# EAGLE board arduino_l293d (EAGLE 5.12)
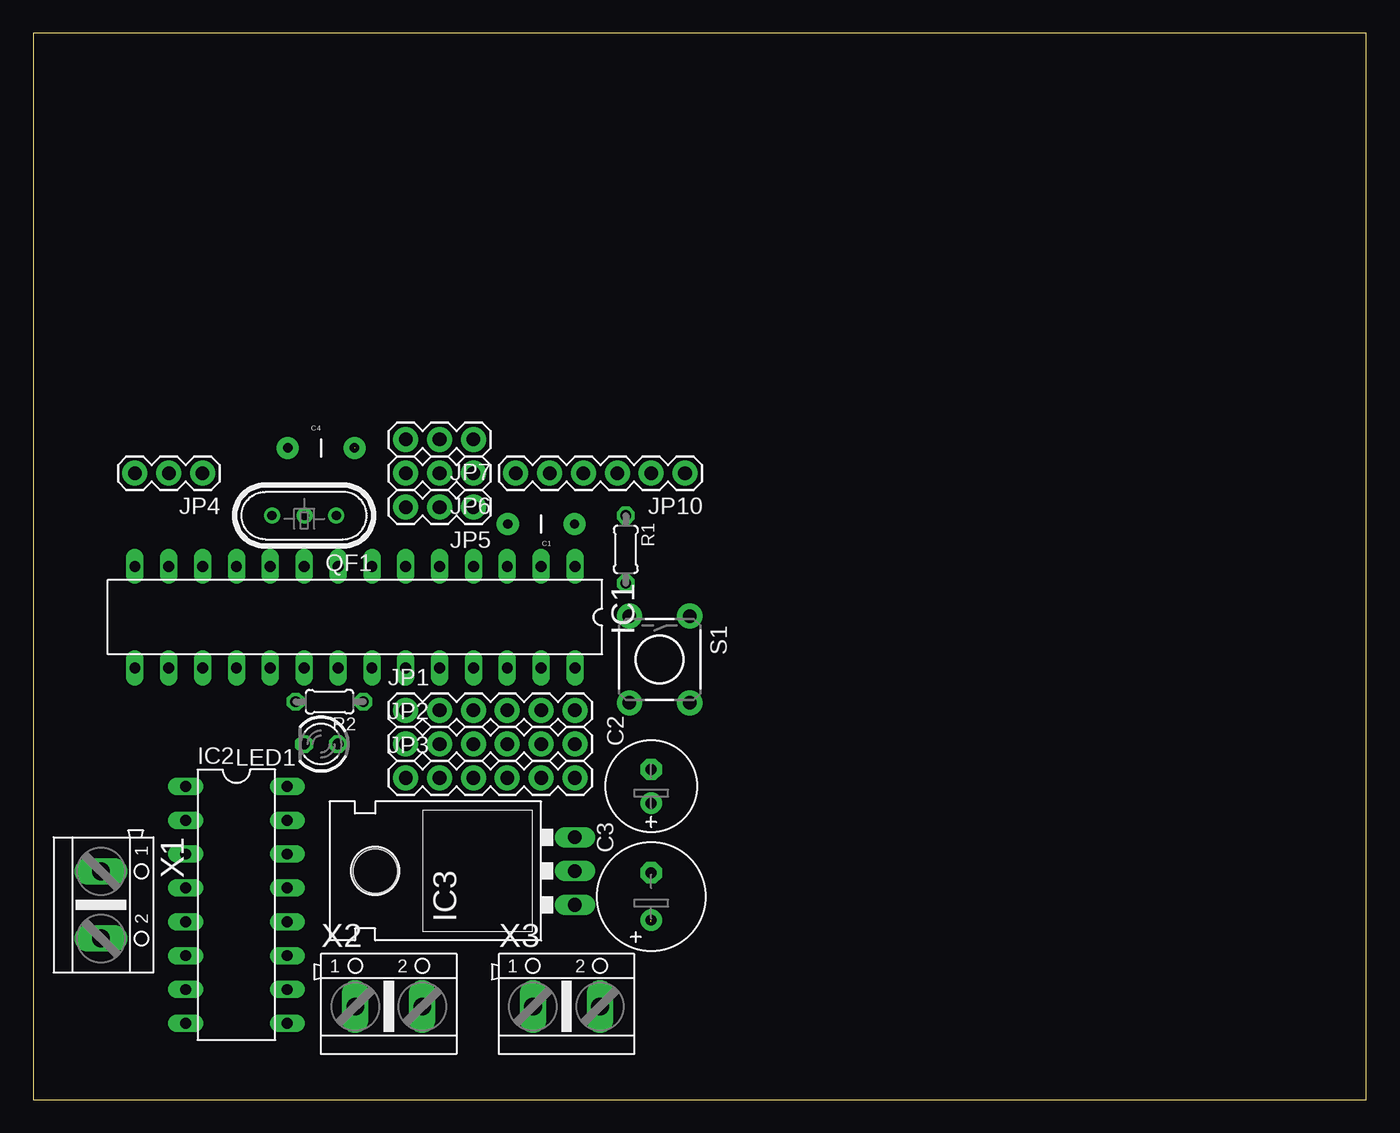
[diagram p0: board, top side]
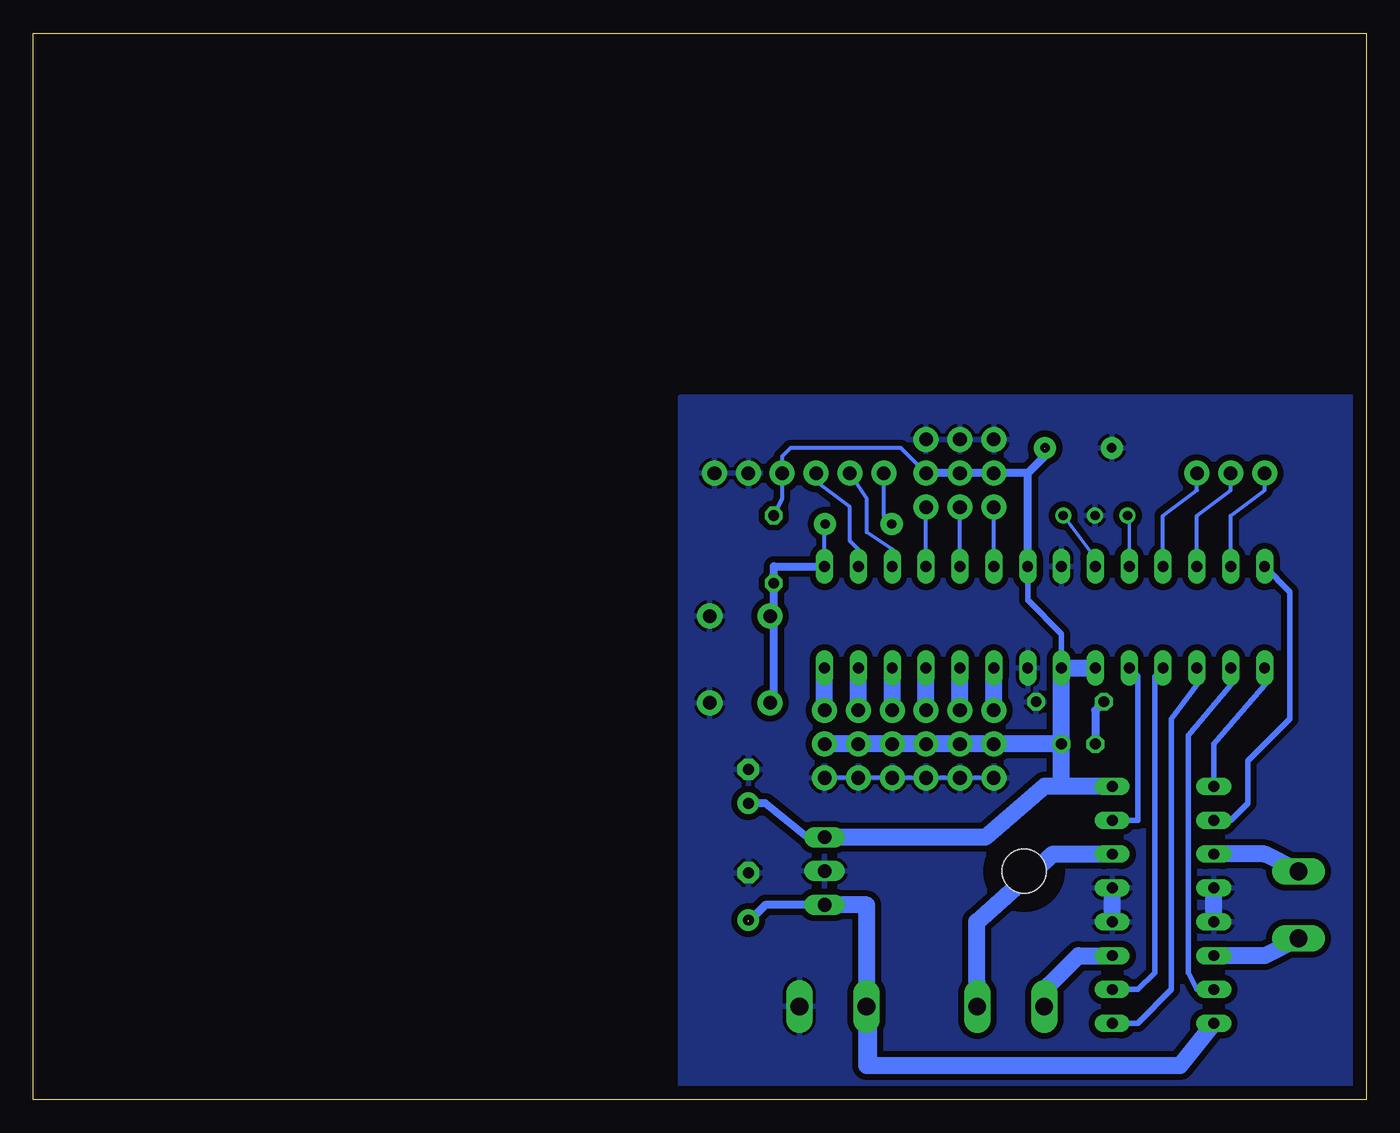
[diagram p1: board, bottom side, seen from below]

Size 100 x 80 mm. Coordinates in mm from the lower left corner, seen from the top.
Outline: 0,0 100,0 100,80 0,80 0,0
Copper layers (1*16): Top 0.035mm / dielectric 1.5mm / Bottom 0.035mm
Design rules "default *": minimum track width 10mil, minimum drill 24mil, track to track 18mil, track to pad 18mil, pad to pad 8mil, via to via 8mil, smd to smd 8mil, copper to edge 40mil, drill to drill 8mil, minimum pad ring 10mil, minimum via ring 8mil, stop-mask expansion 4mil, vias tented up to drill 0mil, thermal gap 10mil

## Footprints (pad centres in the part's own frame; a part is rotated, then mirrored left to right if it is on the bottom)
CAP-PTH-5MM = drill 0.7 pad 1.651 round: 1 -2.5,0; 2 2.5,0
E2,5-7 = drill 0.813 pad 1.6 round: + -1.27,0 | drill 0.813 pad 1.6 octagon: - 1.27,0
E3,5-8 = drill 0.813 pad 1.6 round: + -1.778,0 | drill 0.813 pad 1.6 octagon: - 1.778,0
DIL28-3 = drill 0.813 long: 1 -16.51,-3.81; 2 -13.97,-3.81; 3 -11.43,-3.81; 4 -8.89,-3.81; 5 -6.35,-3.81; 6 -3.81,-3.81; 7 -1.27,-3.81; 8 1.27,-3.81; 9 3.81,-3.81; 10 6.35,-3.81; 11 8.89,-3.81; 12 11.43,-3.81; 13 13.97,-3.81; 14 16.51,-3.81; 15 16.51,3.81; 16 13.97,3.81; 17 11.43,3.81; 18 8.89,3.81; 19 6.35,3.81; 20 3.81,3.81; 21 1.27,3.81; 22 -1.27,3.81; 23 -3.81,3.81; 24 -6.35,3.81; 25 -8.89,3.81; 26 -11.43,3.81; 27 -13.97,3.81; 28 -16.51,3.81
DIL16 = drill 0.813 long: 1 -8.89,-3.81; 2 -6.35,-3.81; 3 -3.81,-3.81; 4 -1.27,-3.81; 5 1.27,-3.81; 6 3.81,-3.81; 7 6.35,-3.81; 8 8.89,-3.81; 9 8.89,3.81; 10 6.35,3.81; 11 3.81,3.81; 12 1.27,3.81; 13 -1.27,3.81; 14 -3.81,3.81; 15 -6.35,3.81; 16 -8.89,3.81
TO-220-ALT = drill 1.016 long: GND 0,-3.81; IN -2.54,-3.81; OUT 2.54,-3.81 | hole 3.302: 0,11.176
1X06 = drill 1.016 pad 1.88 round: 1 0,0; 2 2.54,0; 3 5.08,0; 4 7.62,0; 5 10.16,0; 6 12.7,0
1X03 = drill 1.016 pad 1.88 round: 1 0,0; 2 2.54,0; 3 5.08,0
LED3MM = drill 0.813 octagon: A -1.27,0; K 1.27,0
HC49U = drill 0.7 pad 1.2 round: 1 -2.413,0; 2 -0.027,0; 3 2.413,0
0204/5 = drill 0.813 octagon: 1 -2.54,0; 2 2.54,0
TACTILE-PTH = drill 1.016 pad 1.88 round: 1 -3.251,2.261; 2 3.251,2.261; 3 -3.251,-2.261; 4 3.251,-2.261
AK500/2 = drill 1.321 long: 1 -2.515,0; 2 2.515,0

## Placement (x,y rotation side)
C1  [CAP-PTH-5MM]  38.1,43.18 180 top
C2  [E2,5-7]  46.35,23.5 90 top
C3  [E3,5-8]  46.35,15.24 90 top
C4  [CAP-PTH-5MM]  21.59,48.9 0 top
IC1  MEGA8-P  [DIL28-3]  24.13,36.2 180 top
IC2  L293D  [DIL16]  15.24,14.61 270 top
IC3  [TO-220-ALT]  36.83,17.14 90 top
JP1  [1X06]  27.94,29.21 0 top
JP2  [1X06]  27.94,26.67 0 top
JP3  [1X06]  27.94,24.13 0 top
JP4  [1X03]  12.7,46.99 180 top
JP5  [1X03]  33.02,44.45 180 top
JP6  [1X03]  33.02,46.99 180 top
JP7  [1X03]  33.02,49.53 180 top
JP10  [1X06]  48.9,46.99 180 top
LED1  [LED3MM]  21.59,26.67 180 top
QF1  10M10BHC49T  [HC49U]  20.32,43.81 180 top
R1  [0204/5]  44.45,41.27 270 top
R2  [0204/5]  22.23,29.84 180 top
S1  [TACTILE-PTH]  46.99,33.02 270 top
X1  [AK500/2]  5.08,14.61 270 top
X2  [AK500/2]  26.67,6.99 0 top
X3  [AK500/2]  40.01,6.99 0 top

## Library data of the parts
C1 C4 IC3 JP1-JP7 JP10 S1 = SparkFun
C2 C3 = resistor
IC1 = atmel; OC_FARNELL: unknown; OC_NEWARK: unknown
IC2 = st-microelectronics; MPN: L293D; OC_FARNELL: 9589619; OC_NEWARK: 56P8249
LED1 = led
QF1 = crystal; OC_FARNELL: unknown; OC_NEWARK: unknown
R1 R2 = rcl
X1-X3 = con-ptr500; OC_FARNELL: unknown; OC_NEWARK: unknown

## Nets
+5V: C2.+ C4.2 IC1.7 IC1.20 IC1.21 IC2.16 IC3.OUT JP2.1 JP2.2 JP2.3 JP2.4 JP2.5 JP2.6 JP6.1 JP6.2 JP6.3 JP10.3 LED1.A R1.1
+24V: C3.+ IC2.8 IC3.IN X3.1
EN_12: IC1.15 IC2.1
EN_34: IC1.17 IC2.9
GND: C2.- C3.- C4.1 IC1.8 IC1.22 IC2.4 IC2.5 IC2.12 IC2.13 IC3.GND JP3.1 JP3.2 JP3.3 JP3.4 JP3.5 JP3.6 JP7.1 JP7.2 JP7.3 JP10.1 JP10.2 QF1.2 R2.1 S1.1 S1.2 X3.2
IN_1A: IC1.14 IC2.2
IN_2A: IC1.16 IC2.7
IN_3A: IC1.18 IC2.10
IN_4A: IC1.19 IC2.15
N$1: IC2.3 X1.1
N$2: IC1.10 QF1.3
N$3: IC1.9 QF1.1
N$4: IC2.6 X1.2
N$5: IC1.23 JP1.1
N$6: IC2.14 X2.2
N$7: IC2.11 X2.1
N$8: IC1.24 JP1.2
N$9: IC1.25 JP1.3
N$10: IC1.26 JP1.4
N$11: IC1.27 JP1.5
N$12: IC1.28 JP1.6
N$13: IC1.11 JP4.1
N$14: IC1.12 JP4.2
N$15: IC1.13 JP4.3
N$16: IC1.4 JP5.1
N$17: IC1.5 JP5.2
N$18: IC1.6 JP5.3
N$19: LED1.K R2.2
N$23: IC1.3 JP10.5
N$25: IC1.2 JP10.4
N$27: C1.1 IC1.1 R1.2 S1.3 S1.4
N$28: C1.2 JP10.6

## Tracks (layer width: path | path; a pad name or v marks a point on that pad's centre or on a via)
+5V  (1 unrouted)
  Bottom 0.305: JP2.6 JP2.5 JP2.4 JP2.3 JP2.2 JP2.1 LED1.A | R1.1 43.81,45.09 JP10.3 43.81,48.26 43.18,48.9 34.92,48.9 JP6.1
  Bottom 0.406: IC1.21 22.86,34.92 25.4,37.47 IC1.7
  Bottom 0.61: IC3.OUT 41.91,19.68 45.09,22.23 C2.+ | 25.4,46.99 24.13,48.26 24.13,48.9 | IC1.7 25.4,46.99 | 25.4,46.99 JP6.3 JP6.2 JP6.1
  Bottom 1.27: 22.86,23.5 LED1.A | LED1.A IC1.21 IC1.20 | IC3.OUT 28.57,19.68 24.13,23.5 22.86,23.5 | IC2.16 22.86,23.5 | LED1.A JP2.6
+24V  (1 unrouted)
  Bottom 0.254: 36.83,2.54 36.83,6.35 X3.1
  Bottom 0.61: 46.35,13.34 45.09,14.61 IC3.IN
  Bottom 1.27: IC2.8 13.97,2.54 36.83,2.54 37.47,2.54 37.47,14.61 IC3.IN
EN_12
  Bottom 0.406: IC1.15 7.62,31.11 11.43,26.67 IC2.1
EN_34
  Bottom 0.406: IC2.9 17.14,5.71 14.61,8.26 14.61,28.57 12.7,31.11 IC1.17
GND
  Bottom 0.305: JP3.1 JP3.2 JP3.3 JP3.4 JP3.5 JP3.6
  Bottom 1.27: IC2.5 IC2.4 | IC2.12 IC2.13
  pour Bottom: 0.64,52.7 0.64,0.64 51.44,0.64 51.44,52.7
IN_1A
  Bottom 0.406: IC2.2 10.16,20.95 8.89,22.23 8.89,25.4 5.71,28.57 5.71,38.1 IC1.14
IN_2A
  Bottom 0.406: IC1.16 10.16,31.11 13.34,27.3 13.34,9.53 12.7,8.26 IC2.7
IN_3A
  Bottom 0.406: IC1.18 15.88,31.75 15.88,9.53 17.14,8.26 IC2.10
IN_4A
  Bottom 0.406: IC2.15 17.14,20.95 17.14,31.75 IC1.19
N$1
  Bottom 0.254: X1.1 5.08,17.78 5.33,17.27
  Bottom 1.27: IC2.3 7.62,18.41 5.33,17.27 5.08,17.14
N$2
  Bottom 0.254: IC1.10 17.78,43.81 QF1.3
N$3
  Bottom 0.254: IC1.9 20.32,40.64 QF1.1
N$4
  Bottom 0.254: 5.08,12.7 X1.2 5.08,12.06
  Bottom 1.27: IC2.6 7.62,10.79 5.08,12.06
N$5
  Bottom 1.27: JP1.1 IC1.23
N$6
  Bottom 0.254: 29.21,8.89 29.21,7.62 X2.2
  Bottom 1.27: IC2.14 23.5,18.41 29.21,13.34 29.21,8.89 29.21,8.26
N$7
  Bottom 0.254: X2.1 24.13,7.62 24.13,8.89 23.81,8.57
  Bottom 1.27: 24.13,8.26 23.81,8.57 21.59,10.79 IC2.11
N$8
  Bottom 1.27: JP1.2 IC1.24
N$9
  Bottom 1.27: JP1.3 IC1.25
N$10
  Bottom 1.27: JP1.4 IC1.26
N$11
  Bottom 1.27: JP1.5 IC1.27
N$12
  Bottom 1.27: JP1.6 IC1.28
N$13
  Bottom 0.305: IC1.11 15.24,43.81 12.7,45.72 JP4.1
N$14
  Bottom 0.305: IC1.12 12.7,43.81 10.16,45.72 JP4.2
N$15
  Bottom 0.305: IC1.13 10.16,43.81 7.62,45.72 JP4.3
N$16
  Bottom 0.305: IC1.4 JP5.1
N$17
  Bottom 0.305: IC1.5 JP5.2
N$18
  Bottom 0.305: IC1.6 JP5.3
N$19
  Bottom 0.61: R2.2 20.32,29.21 LED1.K
N$23
  Bottom 0.305: JP10.5 37.47,45.09 37.47,42.55 35.56,41.27 IC1.3
N$25
  Bottom 0.305: IC1.2 38.1,41.27 38.73,41.91 38.73,44.45 41.27,46.35 JP10.4
N$27
  Bottom 0.254: 40.64,43.18 C1.1
  Bottom 0.305: IC1.1 40.64,43.18
  Bottom 0.61: IC1.1 44.45,40.01 R1.2 44.45,36.83 S1.3 44.45,35.56 44.45,30.48 S1.4
N$28
  Bottom 0.254: C1.2 35.56,43.18
  Bottom 0.305: 35.56,43.18 36.2,43.81 JP10.6